# Altium PCB 24V Multiphase Buck.PcbDoc
Units mil, origin at the board's own origin, x right, y up, seen from the top; angles counter-clockwise.
Board outline 4765 x 3833 mil, 4 copper layers (TOP, GND, PWR, BOT), stack 60.512 mil thick; 70 components, 29 nets, 169 pads, 320 vias.
Unrouted connection lines stored in the file: 2.
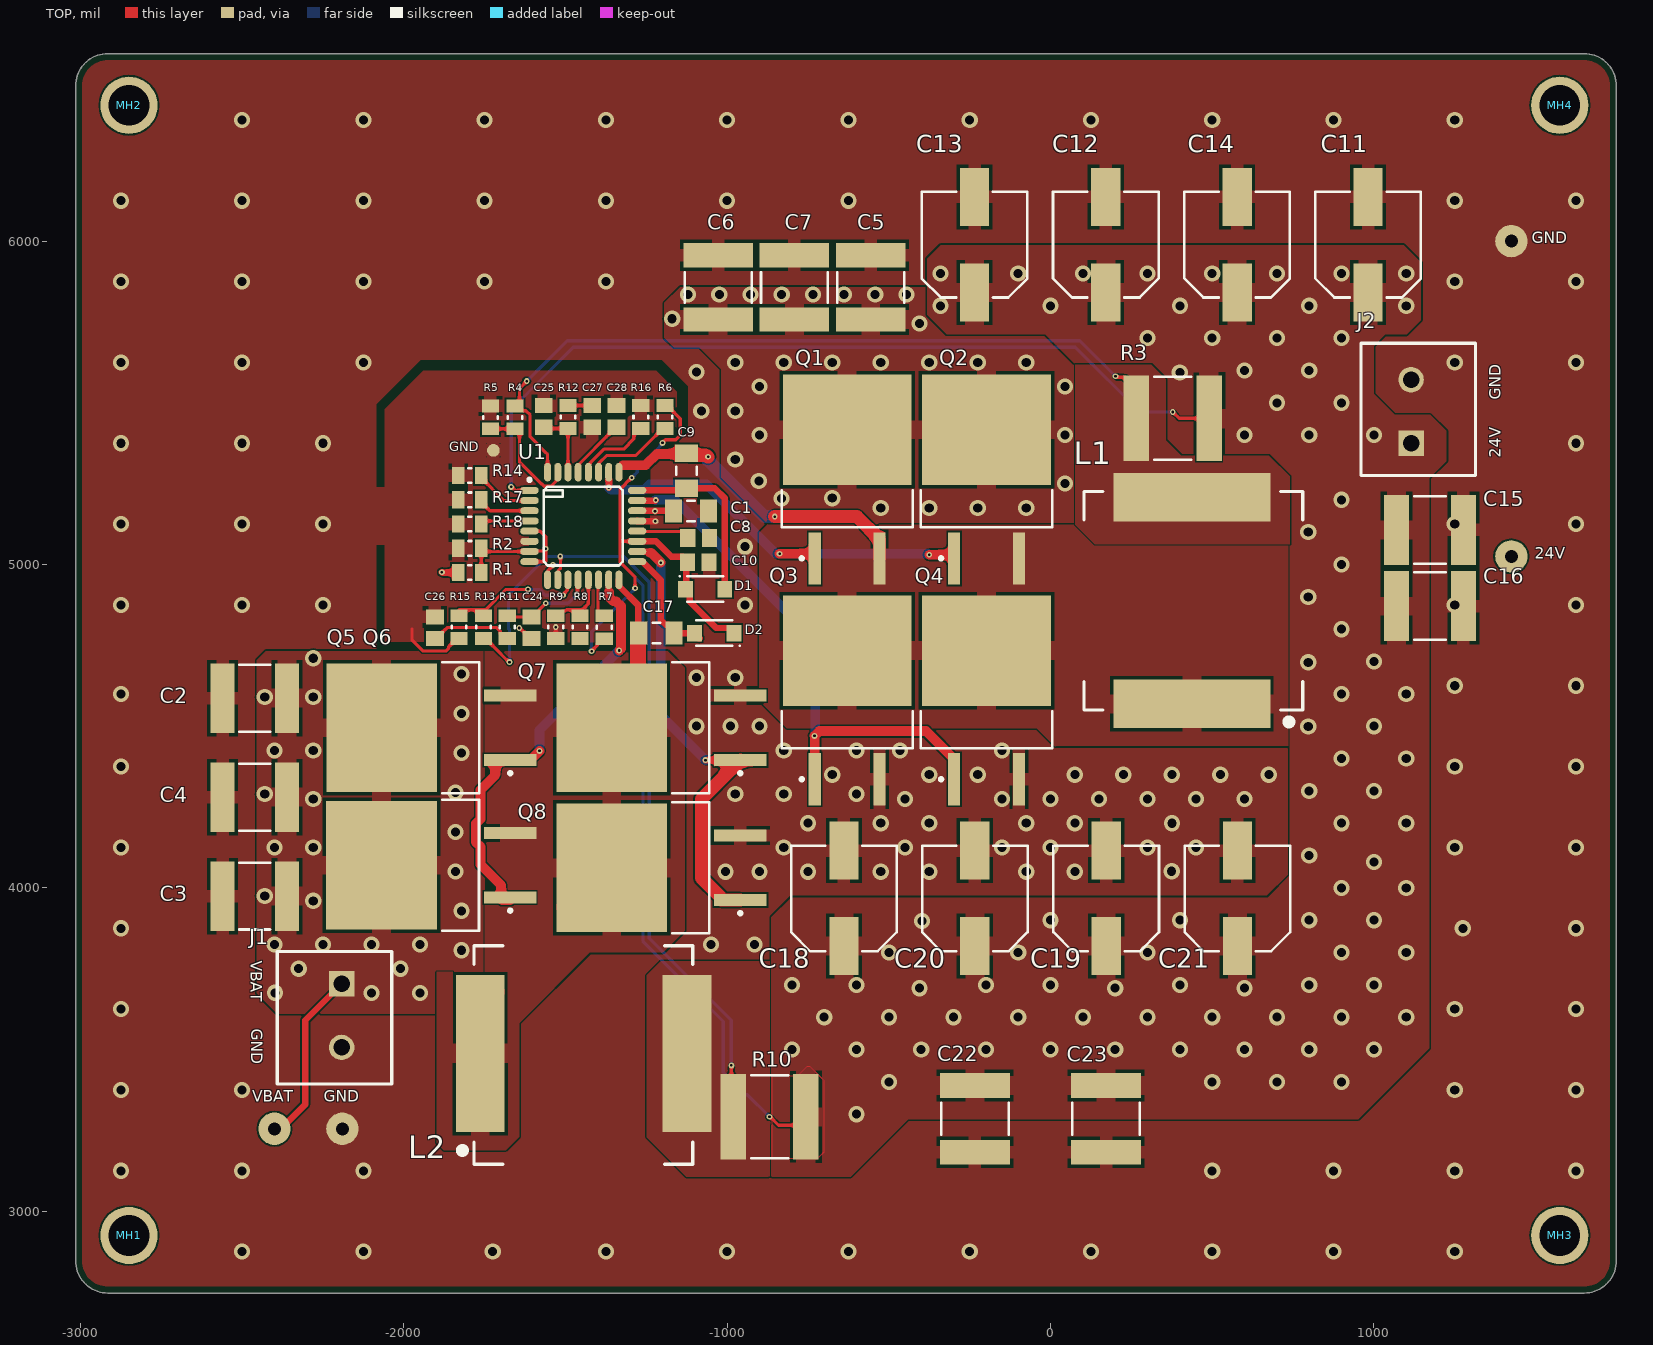
[diagram p0: TOP view]
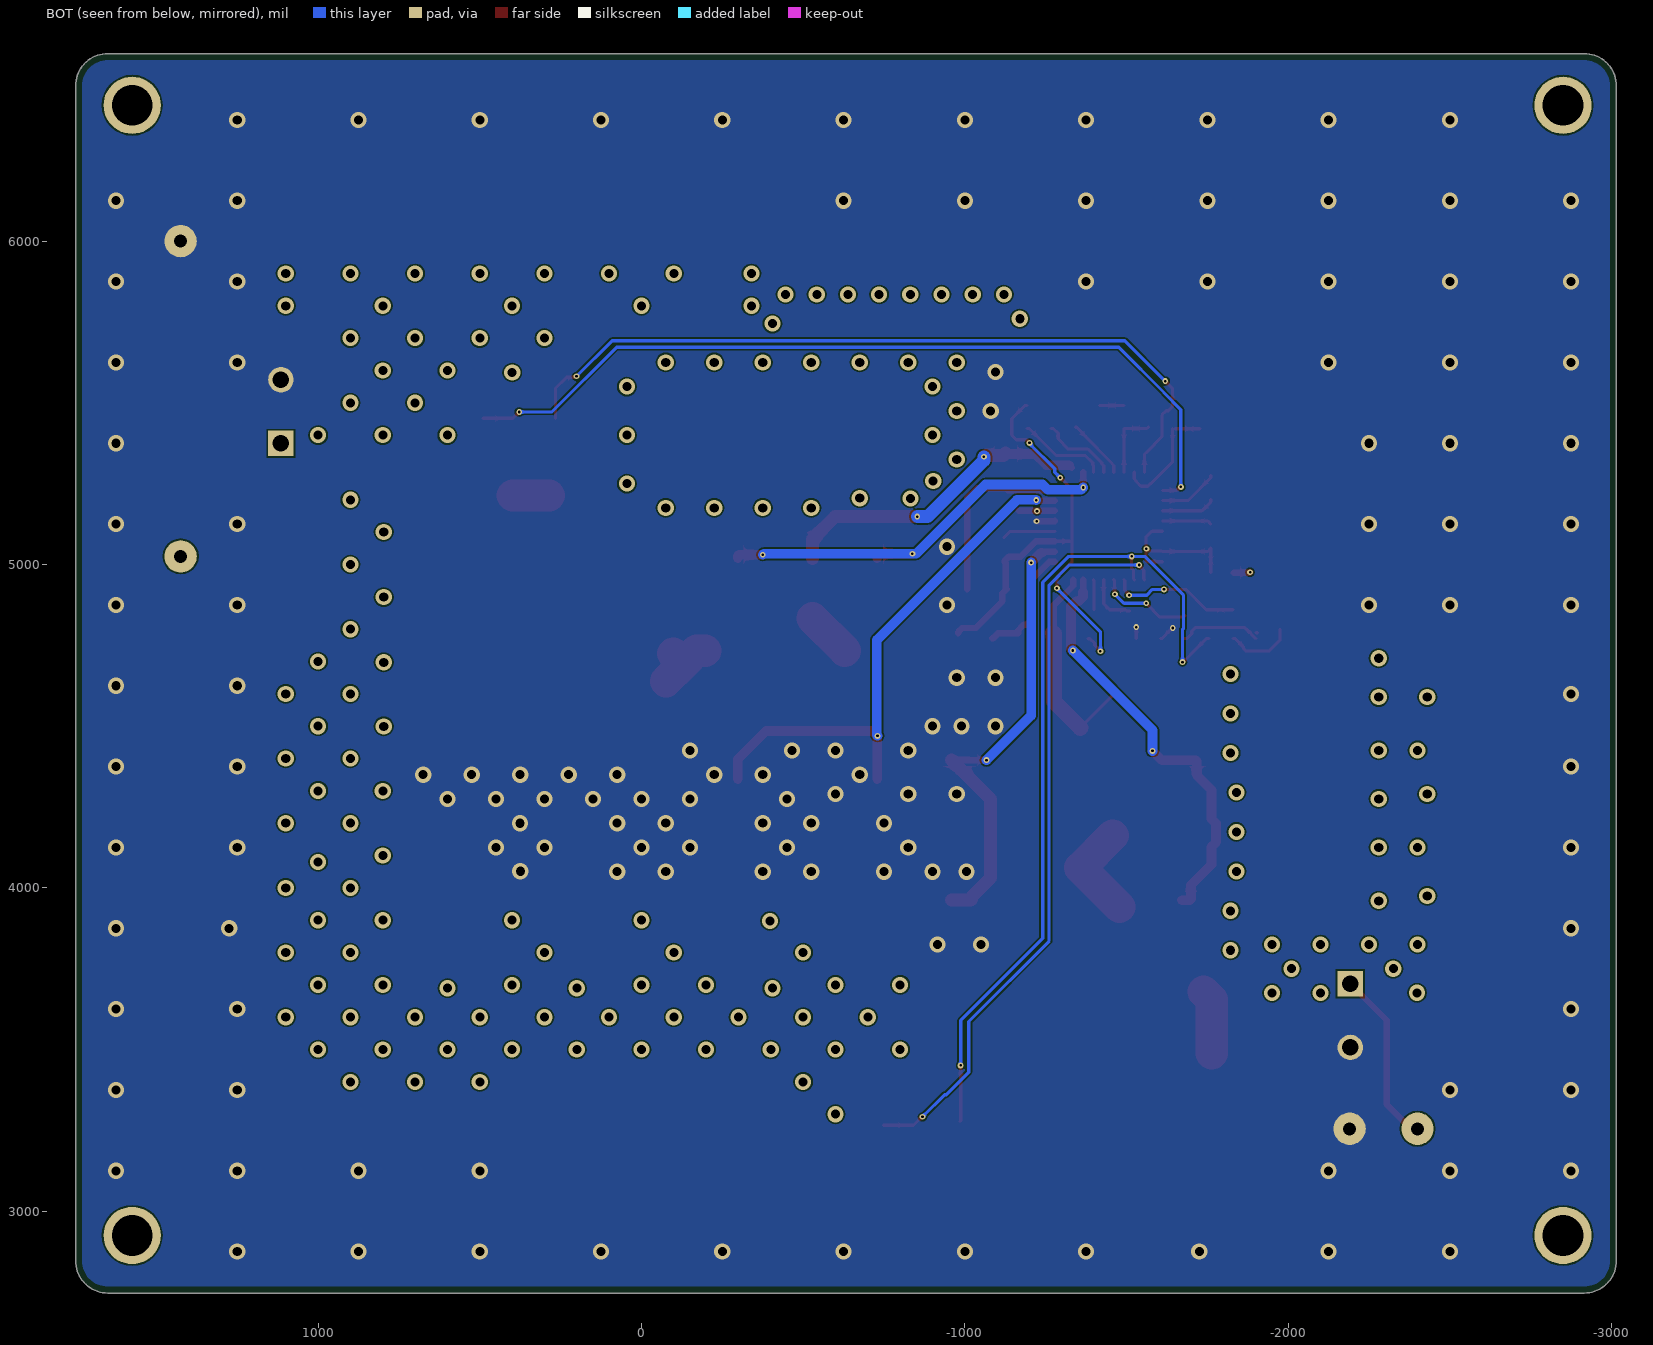
[diagram p1: BOT view, seen from below]
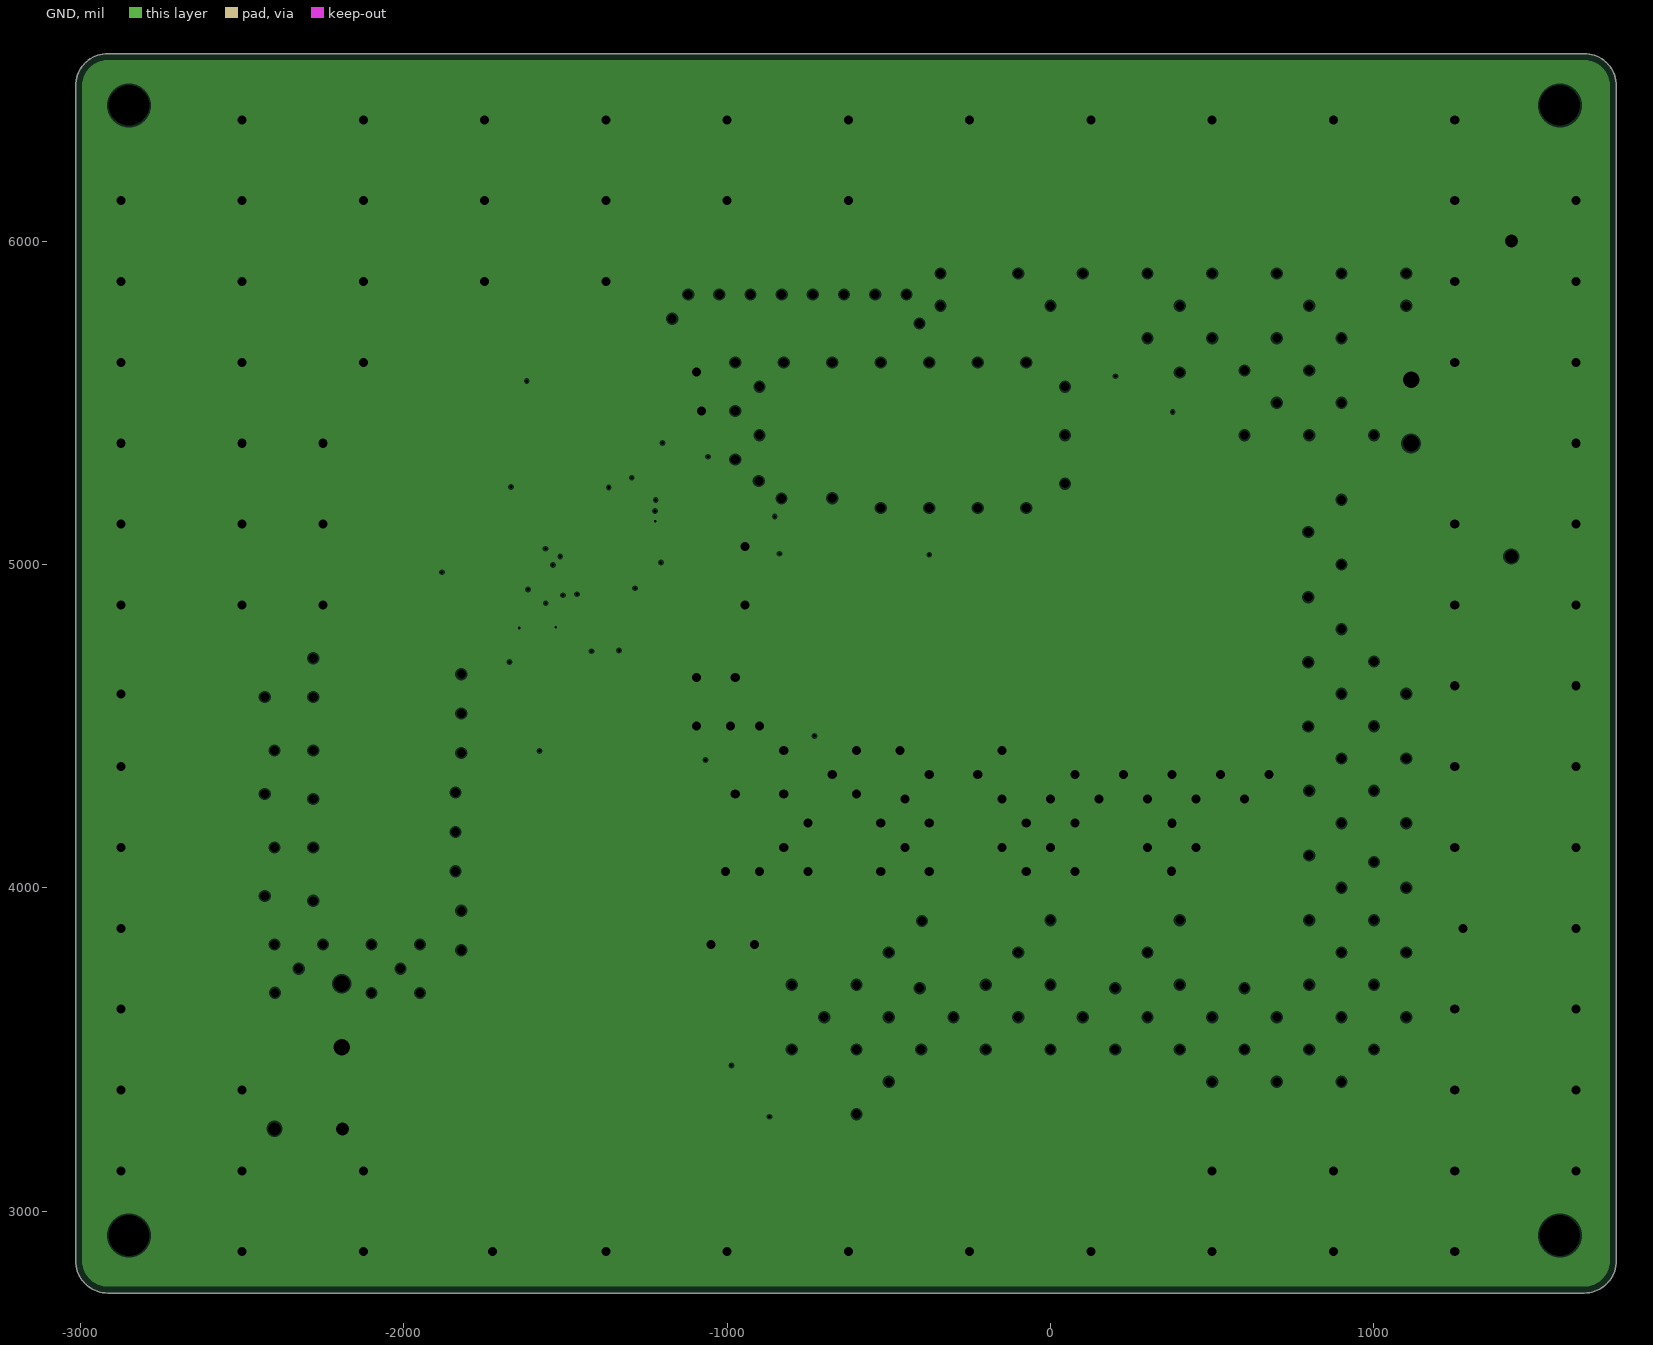
[diagram p2: GND, clearances drawn from the general rule]
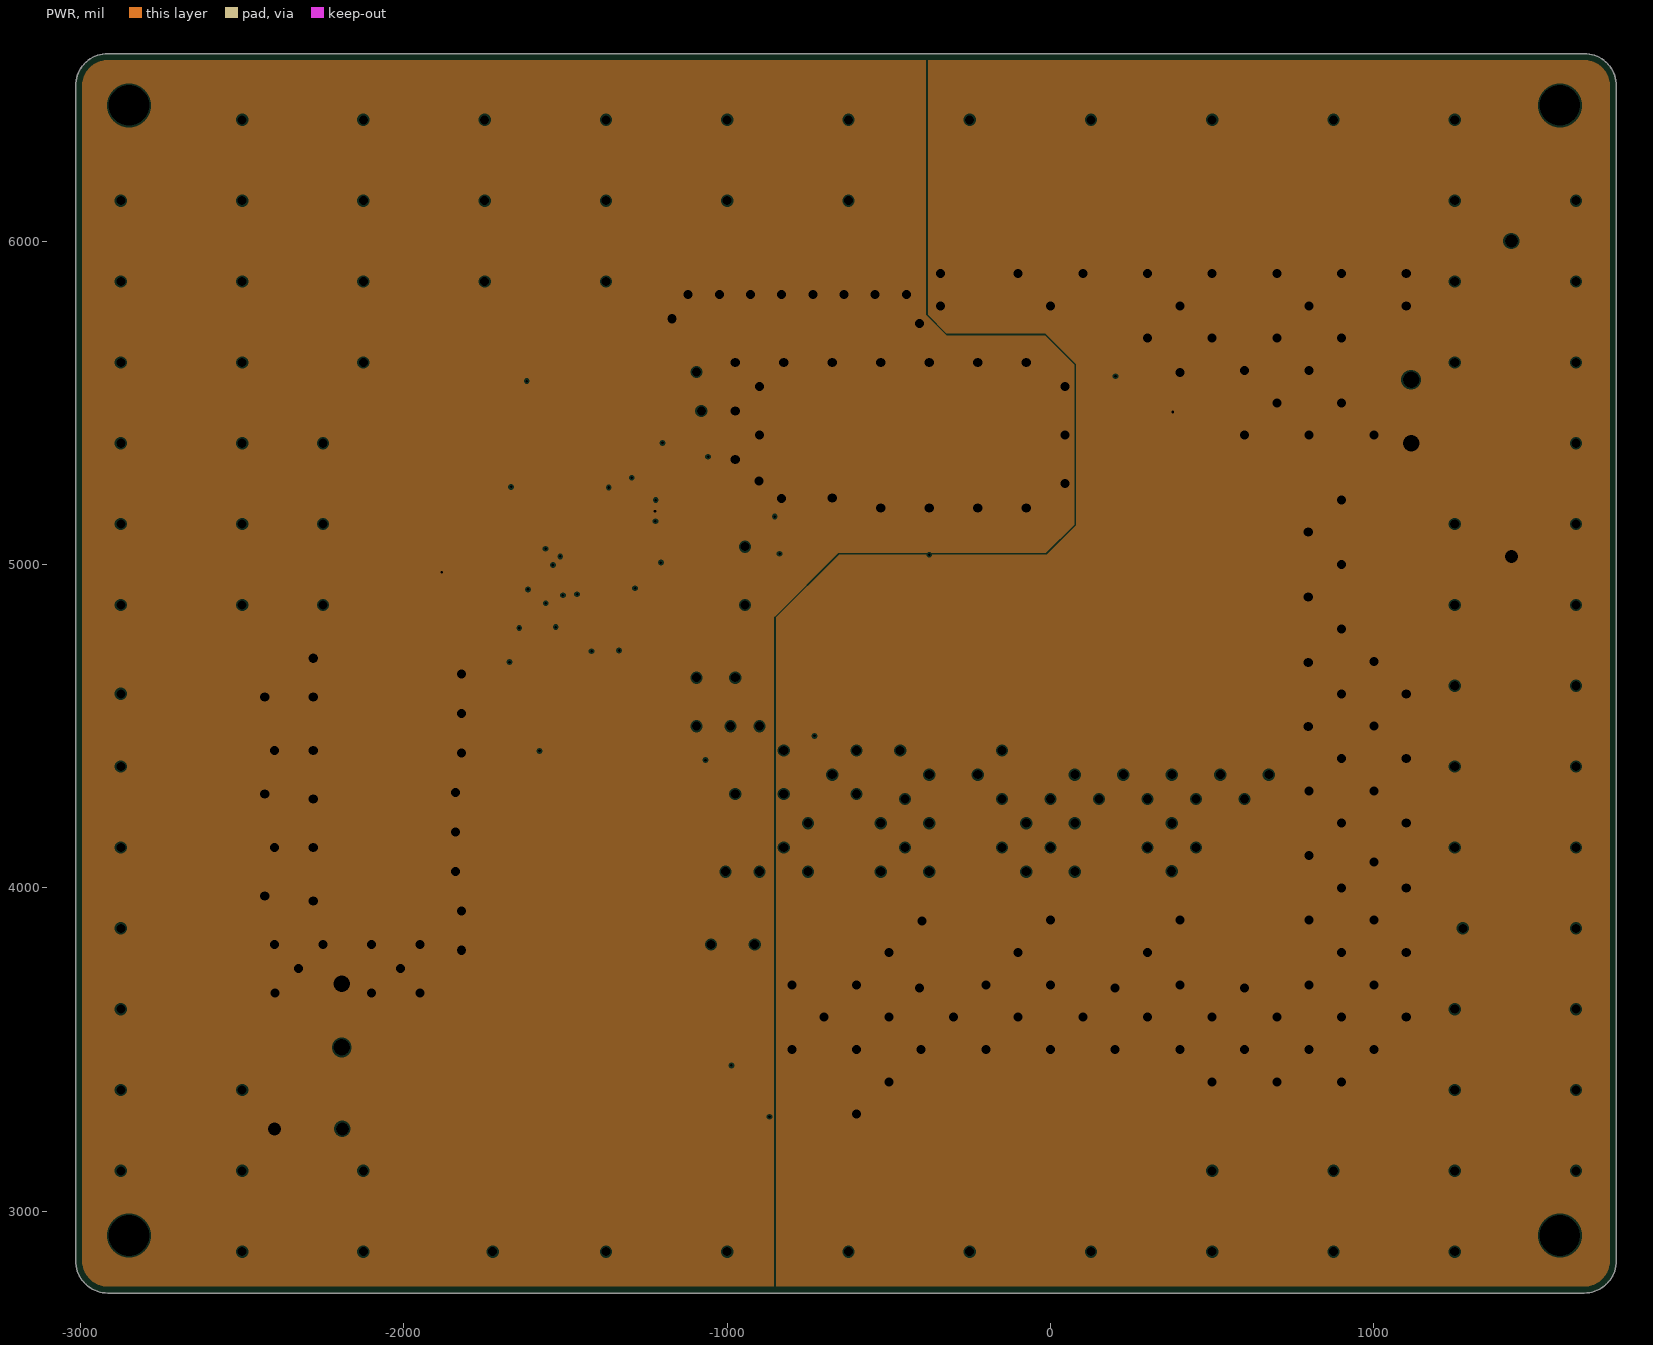
[diagram p3: PWR, clearances drawn from the general rule]
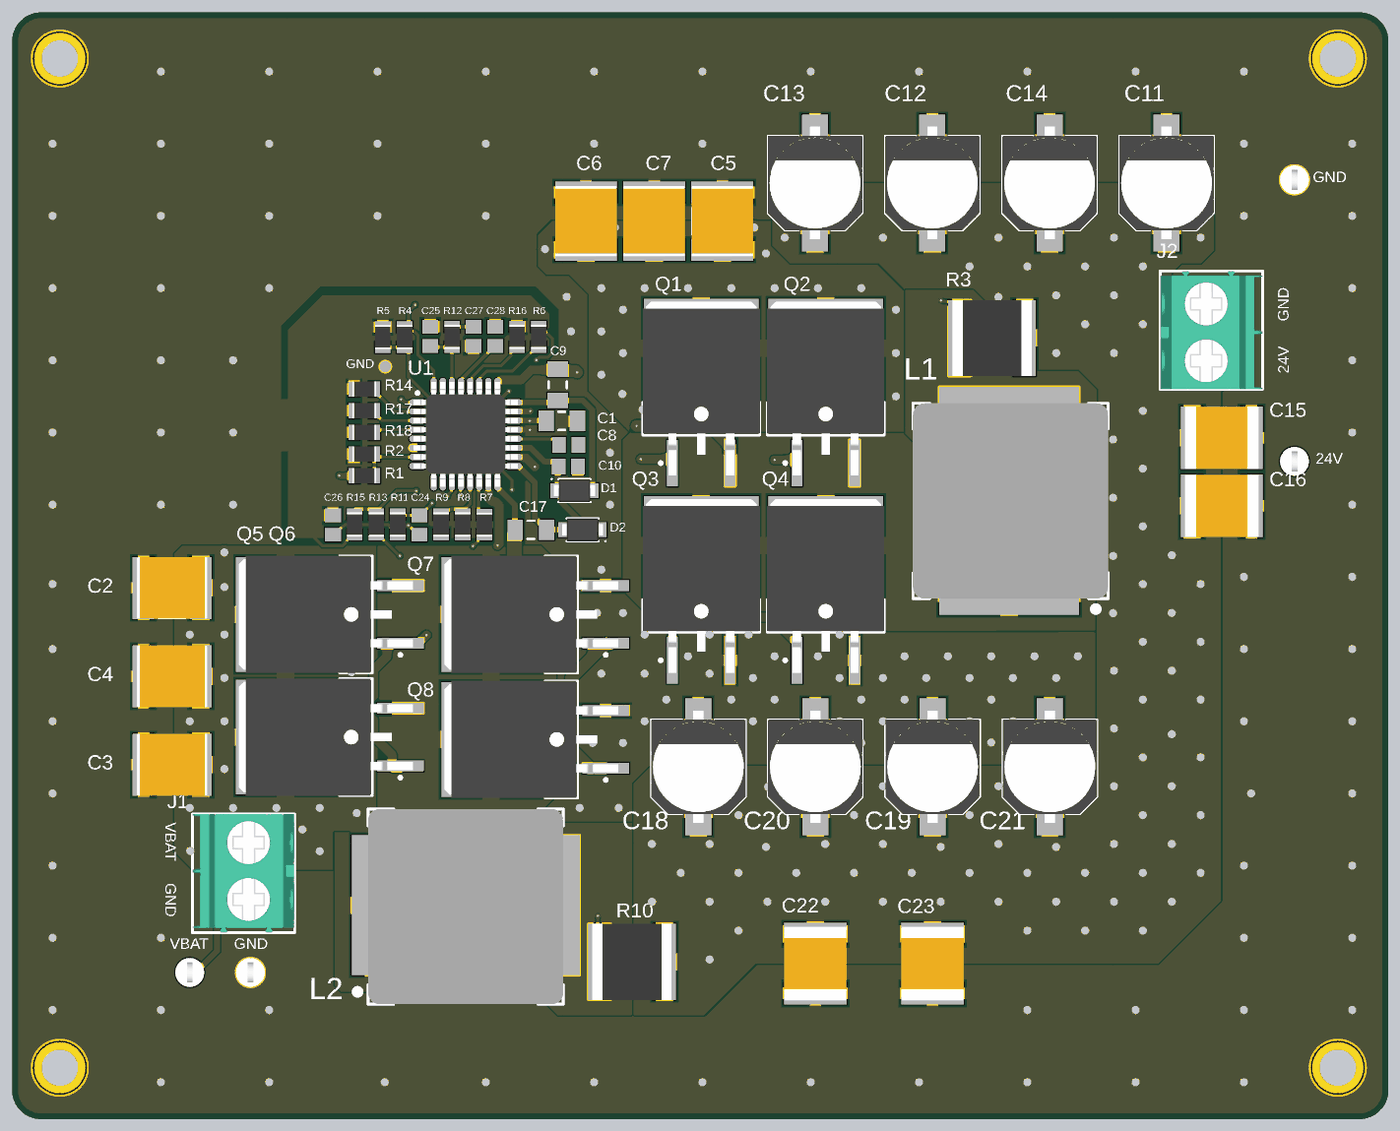
[diagram p4: 3D render of the assembled board from above, using the file's embedded part models]

## Layer stack, top to bottom
Top Solder: solder mask 1, SM-001, Dk 4
TOP: signal copper 1.378
Dielectric 2: prepreg 7.5, PP-017, Dk 4.3
GND: plane copper 1.378, net GND
Dielectric 3: core 40, Core-039, Dk 4.8
PWR: plane copper 1.378, net VBAT
Dielectric 4: prepreg 7.5, PP-017, Dk 4.3
BOT: signal copper 1.378
Bottom Solder: solder mask 1, SM-001, Dk 4

## Board outline
-3015,2847 -3015,6480 cw(c-2915,6480) -2915,6580 1650,6580 cw(c1650,6480) 1750,6480 1750,2847 cw(c1650,2847) 1650,2747 -2915,2747 cw(c-2915,2847)

## Design rules (kind name [scope] priority, off if disabled: settings)
BoardOutlineClearance [All] p1: gap=20 ignorepadtopadclearanceinfootprint=FALSE except(10: Text-OutlineEdge Text-CavityEdge Text-CutoutEdge Text-SplitBarrior Text-SplitContinuation)
Clearance [All] p1: gap=5 ignorepadtopadclearanceinfootprint=FALSE except(10: Arc-Arc Arc-Track Arc-SMDPad Arc-THPad Arc-Via Track-Track Track-SMDPad Track-THPad Track-Via)
HoleSize [All] p1: absolutevalues=TRUE maxlimit=200 minlimit=1 maxpercent=80.000 minpercent=20.000
MinimumSolderMaskSliver [All] p1: minsoldermaskwidth=5
PlaneClearance [All] p1: clearance=5
PlaneConnect [All] p1: pad.planeconnectstyle=Relief pad.reliefexpansion=20 pad.reliefentries=4 pad.reliefconductorwidth=10 pad.reliefairgap=10 via.planeconnectstyle=Direct via.reliefexpansion=20 via.reliefentries=4 via.reliefconductorwidth=10 via.reliefairgap=10
PlaneConnect PlaneConnect_1 [All] p2: pad.planeconnectstyle=Relief pad.reliefexpansion=20 pad.reliefentries=4 pad.reliefconductorwidth=10 pad.reliefairgap=10 via.planeconnectstyle=Direct via.reliefexpansion=20 via.reliefentries=4 via.reliefconductorwidth=10 via.reliefairgap=10
PolygonConnect PolygonConnect_1 [(InNet('24V') AND InComponent('U1')) vs InNet('24V')] p1: thpad.connectstyle=Relief thpad.reliefconductorwidth=10 thpad.reliefentries=4 thpad.polygonreliefangle="90 Angle" thpad.airgapwidth=10 smdpad.connectstyle=NoConnect smdpad.reliefconductorwidth=10 smdpad.reliefentries=4 smdpad.polygonreliefangle="90 Angle" smdpad.airgapwidth=10 via.connectstyle=Relief via.reliefconductorwidth=10 via.reliefentries=4 via.polygonreliefangle="90 Angle" via.airgapwidth=10
PolygonConnect "IC Direct Connect" [HasFootprint('CQFP80P900X900X120-32N') vs InNet('24V')] p2: thpad.connectstyle=Relief thpad.reliefconductorwidth=10 thpad.reliefentries=4 thpad.polygonreliefangle="90 Angle" thpad.airgapwidth=10 smdpad.connectstyle=Direct smdpad.reliefconductorwidth=10 smdpad.reliefentries=4 smdpad.polygonreliefangle="90 Angle" smdpad.airgapwidth=10 via.connectstyle=Relief via.reliefconductorwidth=10 via.reliefentries=4 via.polygonreliefangle="90 Angle" via.airgapwidth=10
PolygonConnect 24V [InNet('24V') vs InNet('24V')] p3: thpad.connectstyle=Direct thpad.reliefconductorwidth=10 thpad.reliefentries=4 thpad.polygonreliefangle="90 Angle" thpad.airgapwidth=10 smdpad.connectstyle=Relief smdpad.reliefconductorwidth=60 smdpad.reliefentries=4 smdpad.polygonreliefangle="90 Angle" smdpad.airgapwidth=10 via.connectstyle=Direct via.reliefconductorwidth=10 via.reliefentries=4 via.polygonreliefangle="90 Angle" via.airgapwidth=10
PolygonConnect NetL1_2 [InNet('NetL1_2') vs InNet('NetL1_2')] p4: thpad.connectstyle=Relief thpad.reliefconductorwidth=10 thpad.reliefentries=4 thpad.polygonreliefangle="90 Angle" thpad.airgapwidth=10 smdpad.connectstyle=Direct smdpad.reliefconductorwidth=60 smdpad.reliefentries=4 smdpad.polygonreliefangle="90 Angle" smdpad.airgapwidth=10 via.connectstyle=Direct via.reliefconductorwidth=10 via.reliefentries=4 via.polygonreliefangle="90 Angle" via.airgapwidth=10
PolygonConnect NetL2_1 [InNet('NetL2_2') vs InNet('NetL2_2')] p5: thpad.connectstyle=Relief thpad.reliefconductorwidth=10 thpad.reliefentries=4 thpad.polygonreliefangle="90 Angle" thpad.airgapwidth=10 smdpad.connectstyle=Direct smdpad.reliefconductorwidth=60 smdpad.reliefentries=4 smdpad.polygonreliefangle="90 Angle" smdpad.airgapwidth=10 via.connectstyle=Direct via.reliefconductorwidth=10 via.reliefentries=4 via.polygonreliefangle="90 Angle" via.airgapwidth=10
PolygonConnect LX2 [InNet('LX2') vs InNet('LX2')] p6: thpad.connectstyle=Relief thpad.reliefconductorwidth=10 thpad.reliefentries=4 thpad.polygonreliefangle="90 Angle" thpad.airgapwidth=10 smdpad.connectstyle=Relief smdpad.reliefconductorwidth=60 smdpad.reliefentries=4 smdpad.polygonreliefangle="90 Angle" smdpad.airgapwidth=10 via.connectstyle=Direct via.reliefconductorwidth=10 via.reliefentries=4 via.polygonreliefangle="90 Angle" via.airgapwidth=10
PolygonConnect LX1 [InNet('LX1') vs InNet('LX1')] p7: thpad.connectstyle=Relief thpad.reliefconductorwidth=10 thpad.reliefentries=4 thpad.polygonreliefangle="90 Angle" thpad.airgapwidth=10 smdpad.connectstyle=Relief smdpad.reliefconductorwidth=60 smdpad.reliefentries=4 smdpad.polygonreliefangle="90 Angle" smdpad.airgapwidth=10 via.connectstyle=Direct via.reliefconductorwidth=10 via.reliefentries=4 via.polygonreliefangle="90 Angle" via.airgapwidth=10
PolygonConnect VBAT [InNet('VBAT') vs InNet('VBAT')] p8: thpad.connectstyle=Direct thpad.reliefconductorwidth=10 thpad.reliefentries=4 thpad.polygonreliefangle="90 Angle" thpad.airgapwidth=10 smdpad.connectstyle=Relief smdpad.reliefconductorwidth=60 smdpad.reliefentries=4 smdpad.polygonreliefangle="90 Angle" smdpad.airgapwidth=10 via.connectstyle=Direct via.reliefconductorwidth=10 via.reliefentries=4 via.polygonreliefangle="90 Angle" via.airgapwidth=10
PolygonConnect GND [InNet('GND') vs InNet('GND')] p9: thpad.connectstyle=Direct thpad.reliefconductorwidth=10 thpad.reliefentries=4 thpad.polygonreliefangle="90 Angle" thpad.airgapwidth=10 smdpad.connectstyle=Relief smdpad.reliefconductorwidth=40 smdpad.reliefentries=4 smdpad.polygonreliefangle="90 Angle" smdpad.airgapwidth=10 via.connectstyle=Direct via.reliefconductorwidth=10 via.reliefentries=4 via.polygonreliefangle="90 Angle" via.airgapwidth=10
PolygonConnect [All] p10: thpad.connectstyle=Relief thpad.reliefconductorwidth=10 thpad.reliefentries=4 thpad.polygonreliefangle="90 Angle" thpad.airgapwidth=10 smdpad.connectstyle=Relief smdpad.reliefconductorwidth=10 smdpad.reliefentries=4 smdpad.polygonreliefangle="90 Angle" smdpad.airgapwidth=10 via.connectstyle=Direct via.reliefconductorwidth=10 via.reliefentries=4 via.polygonreliefangle="90 Angle" via.airgapwidth=10
RoutingVias [All] p1: holewidth=8 width=18 viastyle="Through Hole" minholewidth=8 minwidth=18 maxholewidth=8 maxwidth=18
SilkToSilkClearance [All] p1: silktosilkclearance=0
SilkToSolderMaskClearance [IsPad] p1: minsilkscreentomaskgap=5 clearancetoexposedcopper=TRUE
SolderMaskExpansion "Tented Vias" [IsVia] p1: expansion=4 istentingtop=TRUE useseparateexpansions=TRUE expansionbottom=4 istentingbottom=TRUE
SolderMaskExpansion [All] p2: expansion=4 istentingtop=FALSE useseparateexpansions=TRUE expansionbottom=4 istentingbottom=FALSE
Width [All] p1: maxlimit=100 minlimit=5 preferedwidth=10 minimp=50.000000 maximp=50.000000 favimp=50.000000
24 further rules are at their usual default settings.

## Components (designator, comment, footprint, x,y, rotation, side; value= is the part's Value field where it differs from the comment)
24V "TESTPOINT_LOOP" TESTPOINT_LOOP 1425,5025 r90 top (schematic designator TP2)
C1 "Ceramic Cap" C1206 -1112,5165 r180 top value=1uF
C2 "Ceramic Cap" C2220 -2461,4586.54 r0 top value=10uF
C3 "Ceramic Cap" C2220 -2461,3974.59 r0 top value=10uF
C4 "Ceramic Cap" C2220 -2461,4280.56 r0 top value=10uF
C5 "Ceramic Cap" C2220 -556,5857 r270 top value=10uF
C6 "Ceramic Cap" C2220 -1028,5857 r270 top value=10uF
C7 "Ceramic Cap" C2220 -792,5857 r270 top value=10uF
C8 "Ceramic Cap" C0805 -1088,5082 r180 top value=2.2uF
C9 "Ceramic Cap" C1206 -1126.23,5290.13 r270 top value=1uF
C10 "Ceramic Cap" C0805 -1089.46,5007 r180 top value=4.7uF
C11 "Electro Cap" CAPAE9983X105M 982,5989 r90 top value=33uF
C12 "Electro Cap" CAPAE9983X105M 171,5989 r90 top value=33uF
C13 "Electro Cap" CAPAE9983X105M -235,5989 r90 top value=33uF
C14 "Electro Cap" CAPAE9983X105M 577,5989 r90 top value=33uF
C15 "Ceramic Cap" CAPC6153X67N 1173.43,5107 r180 top value=NU
C16 "Ceramic Cap" CAPC6153X67N 1173.43,4871 r180 top value=NU
C17 "Ceramic Cap" C1206 -1219,4788 r0 top value=1uF
C18 "Electro Cap" CAPAE9983X105M -639,3967.36 r90 top value=33uF
C19 "Electro Cap" CAPAE9983X105M 172,3967.36 r90 top value=33uF
C20 "Electro Cap" CAPAE9983X105M -234,3967.36 r90 top value=33uF
C21 "Electro Cap" CAPAE9983X105M 578,3967.36 r90 top value=33uF
C22 "Ceramic Cap" CAPC6153X67N -234,3285.76 r90 top value=NU
C23 "Ceramic Cap" CAPC6153X67N 172,3285.76 r90 top value=NU
C24 "Ceramic Cap" C0805 -1605,4804.35 r90 top value=33pF
C25 "Ceramic Cap" C0805 -1567,5457.97 r270 top value=33pF
C26 "Ceramic Cap" C0805 -1904,4804.35 r270 top value=8.2nF
C27 "Ceramic Cap" C0805 -1417,5457.97 r90 top value=8.2nF
C28 "Ceramic Cap" C0805 -1342,5457.97 r270 top value=6.2nF
D1 "Schottky Diode" SODFL360X110-2N -1068,4924 r0 top
D2 "Schottky Diode" SODFL360X110-2N -1040,4788 r180 top
GND "EMR_TP" TP1 -1723,5372 r90 top (schematic designator TP5)
GND "TESTPOINT_LOOP" TESTPOINT_LOOP -2190,3255 r90 top (schematic designator TP4)
GND "TESTPOINT_LOOP" TESTPOINT_LOOP 1425,6000 r90 top (schematic designator TP3)
J1 "1935161" 1935161 -2192.14,3605 r270 top
J2 "1935161" 1935161 1115,5473 r90 top
L1 "Inductor" IHLP6767GZER5R6M11 437,4888.59 r90 top value=5.6uH
L2 "Inductor" IHLP6767GZER5R6M11 -1444,3488 r0 top value=5.6uH
MH1 "MOUNTING_HOLE_M3" MOUNTING_HOLE_3mm -2850,2925 r0 top
MH2 "MOUNTING_HOLE_M3" MOUNTING_HOLE_3mm -2850,6420 r0 top
MH3 "MOUNTING_HOLE_M3" MOUNTING_HOLE_3mm 1575,2925 r0 top
MH4 "MOUNTING_HOLE_M3" MOUNTING_HOLE_3mm 1575,6420 r0 top
Q1 "BUK768R1-100E,118" DPAK254P1530X450-3N -629,5263.09 r90 top
Q2 "BUK768R1-100E,118" DPAK254P1530X450-3N -198,5263.09 r90 top
Q3 "BUK768R1-100E,118" DPAK254P1530X450-3N -629,4580 r90 top
Q4 "BUK768R1-100E,118" DPAK254P1530X450-3N -198,4580 r90 top
Q5 "BUK768R1-100E,118" DPAK254P1530X450-3N -1915.09,4070 r180 top
Q6 "BUK768R1-100E,118" DPAK254P1530X450-3N -1915,4495 r180 top
Q7 "BUK768R1-100E,118" DPAK254P1530X450-3N -1203.46,4495 r180 top
Q8 "BUK768R1-100E,118" DPAK254P1530X450-3N -1203.46,4062 r180 top
R1 "Resistor" R0805 -1796,4975 r180 top value=191kΩ
R2 "Resistor" R0805 -1796,5050 r0 top value=10kΩ
R3 "Resistor" R2728 378,5452 r0 top value=5mΩ
R4 "Resistor" R0805 -1656,5455 r90 top value=187kΩ
R5 "Resistor" R0805 -1732,5455 r270 top value=6.49kΩ
R6 "Resistor" R0805 -1192,5456 r270 top value=10kΩ
R7 "Resistor" R0805 -1380,4806 r90 top value=10kΩ
R8 "Resistor" R0805 -1455,4806.31 r270 top value=30.9kΩ
R9 "Resistor" R0805 -1530,4806.31 r90 top value=1070Ω
R10 "Resistor" R2728 -869,3292 r0 top value=5mΩ
R11 "Resistor" R0805 -1680,4806.31 r90 top value=19.6kΩ
R12 "Resistor" R0805 -1492,5456 r270 top value=19.6kΩ
R13 "Resistor" R0805 -1754,4806.31 r270 top value=187kΩ
R14 "Resistor" R0805 -1796,5275 r0 top value=71.5kΩ
R15 "Resistor" R0805 -1829,4806.31 r90 top value=6.49kΩ
R16 "Resistor" R0805 -1267,5456 r270 top value=392kΩ
R17 "Resistor" R0805 -1796,5200 r0 top value=392kΩ
R18 "Resistor" R0805 -1796,5125 r0 top value=0Ω
U1 "MAX17559ACJ+" CQFP80P900X900X120-32N -1445,5119 r0 top
VBAT "TESTPOINT_LOOP" TESTPOINT_LOOP -2400,3255 r90 top (schematic designator TP1)

## Footprints (in the part's own frame and the unit in brackets; to place one, negate y for a bottom-side part, rotate by r counter-clockwise, add the part's x,y. Pads: shape width x height; smd on the part's side, far side on the other; paste and mask are expansions set on the pad)
1935161 [mm]
  rect 2x2 hole 1.3: 1(-2.5,0)
  round 2 hole 1.3: 2(2.5,0)
  silkscreen extent -5.03,-5.06 5.37,3.94, body extent -5.03,-5.06 5.37,3.94, height 11.45
C0805 [mm] "Chip Capacitor, 2-Leads, Body 2.00x1.25mm, IPC Medium Density"
  rect 1.2x1.4 smd: 1(-0.85,0) 2(0.85,0)
  body extent -1.05,-0.67 1.05,0.67, height 1.35
C1206 [mm] "Chip Capacitor, 2-Leads, Body 3.20x1.60mm, IPC Medium Density"
  rect 1.35x1.8 smd: 1(-1.375,0) 2(1.375,0)
  silkscreen extent -0.3,-0.8 0.3,0.8, body extent -1.7,-0.9 1.7,0.9, height 1.8
C2220 [mm] "Chip Capacitor, 2-Leads, Body 5.70x5.02mm, IPC Medium Density"
  rect 1.9x5.45 smd: 1(-2.525,0) 2(2.525,0)
  silkscreen extent -1.2,-2.62 1.2,2.63, body extent -3.1,-2.72 3.1,2.72, height 2.79
CAPAE9983X105M [mm] "Aluminum Electrolytic Capacitor, Body 8.30x8.30x10.50mm, IPC Low Density"
  rect 4.55x2.3 smd: 1(-3.75,0) 2(3.75,0)
  silkscreen extent -4.15,-4.15 4.15,4.15, body extent -4.95,-4.15 4.95,4.15, height 10.5
CAPC6153X67N [mm] "Chip Capacitor, 2-Leads, Body 6.10x5.30mm, IPC Medium Density"
  rect 1.95x5.5 smd: 1(-2.625,0) 2(2.625,0)
  silkscreen extent -1.25,-2.65 1.25,2.65, body extent -3.25,-2.75 3.25,2.75, height 6.7
CQFP80P900X900X120-32N [mm] "CQFP, 32-Leads, Body 9.00x9.00mm, Pitch 0.80mm, IPC Medium Density"
  oval 1.45x0.55 smd: 1(-4.225,2.8) 2(-4.225,2) 3(-4.225,1.2) 4(-4.225,0.4) 5(-4.225,-0.4) 6(-4.225,-1.2) 7(-4.225,-2) 8(-4.225,-2.8) 17(4.225,-2.8) 18(4.225,-2) 19(4.225,-1.2) 20(4.225,-0.4) 21(4.225,0.4) 22(4.225,1.2) 23(4.225,2) 24(4.225,2.8)
  oval 0.55x1.45 smd: 9(-2.8,-4.225) 10(-2,-4.225) 11(-1.2,-4.225) 12(-0.4,-4.225) 13(0.4,-4.225) 14(1.2,-4.225) 15(2,-4.225) 16(2.8,-4.225) 25(2.8,4.225) 26(2,4.225) 27(1.2,4.225) 28(0.4,4.225) 29(-0.4,4.225) 30(-1.2,4.225) 31(-2,4.225) 32(-2.8,4.225)
  silkscreen extent -4.35,-3.1 3.1,3.75, body extent -4.6,-4.6 4.6,4.6, height 1.15
DPAK254P1530X450-3N [mm] "D2-PAK, 3-Pads, Body 8.60x8.51mm (max), IPC Medium Density"
  rect 4.1x0.95 smd: 1(-6.2,2.54) 3(-6.2,-2.54)
  rect 8.7x10.1 smd: 2(3.9,0)
  silkscreen extent -6.32,-5.15 -0.85,5.15, body extent -7.3,-5.15 8,5.15, height 4.5
IHLP6767GZER5R6M11 [mm]
  rect 3.825x12.32 smd: 1(-8.117,0) 2(8.117,0)
  silkscreen extent -9.53,-8.71 8.57,8.46, body extent -8.6,-8.71 8.57,8.46, height 6.99
MOUNTING_HOLE_3mm [mm] "3mm Hole"
  round 4.5 hole 3.2 mask+0.3: 0(0,0)
R0805 [mm] "Chip Resistor, 2-Leads, Body 2.00x1.25mm, IPC Medium Density"
  rect 1x1.35 smd: 1(-0.9,0) 2(0.9,0)
  silkscreen extent -0.1,-0.58 0.1,0.58, body extent -1.05,-0.67 1.05,0.67, height 0.6
R2728 [mm] "Chip Resistor, 2-Leads, Body 6.71x6.45mm, IPC Medium Density"
  rect 2x6.7 smd: 1(-2.85,0) 2(2.85,0)
  silkscreen extent -1.45,-3.25 1.45,3.25, body extent -3.48,-3.35 3.48,3.35, height 1.24
SODFL360X110-2N [mm] "SODFL, 2-Leads, Body 1.80x3.60mm, IPC Medium Density"
  rect 1.15x1.3 smd: 1(-1.55,0) 2(1.55,0)
  silkscreen extent -2.05,-1 1.4,1.05, body extent -1.8,-1 1.8,1, height 1.1
TESTPOINT_LOOP [mm]
  round 2.54 hole 1.02: 1(0,0)
  body extent -1.27,-1.27 1.27,1.27, height 4.57
TP1 [mm]
  round 1 smd: 1(-0.483,0)

## Part data
24V GND GND VBAT: "TESTPOINT THRUHOLE", Manufacturer 1="Keystone Electronics", Manufacturer Part Number 1=5002, Package/Footprint=TH, Supplier Part Number 1=36-5002-ND, Mounting Type=TH, Supplier 1=Digi-Key
C1 C9 C17: library part CL31B105KCHNFNE, Capacitance=1uF, Manufacturer="Samsung Electro-Mechanics", Package=1206, Supplier Part Number=1276-3094-2-ND, Voltage=100V, Part Number=CL31B105KCHNFNE, Supplier=Digi-Key, Voltage Rating=100V
C2 C3 C4 C5 C6 C7: library part 22201C106KAT2A, Capacitance=10uF, Manufacturer="KYOCERA AVX", Package=2220, Supplier Part Number=478-12492-1-ND, Voltage=100V, Part Number=22201C106KAT2A, Supplier=Digi-Key, Voltage Rating=100V
C8: library part CL21A225KBFNNNE, Capacitance=2.2uF, Manufacturer="Samsung Electro-Mechanics", Package=0805, Supplier Part Number=1276-6702-1-ND, Voltage=50V, Part Number=CL21A225KBFNNNE, Supplier=Digi-Key, Voltage Rating=50V
C10: library part GRM21BR61H475KE51L, Capacitance=4.7uF, Manufacturer="Murata Electronics", Package=0805, Supplier Part Number=490-10751-1-ND, Voltage=50V, Part Number=GRM21BR61H475KE51L, Supplier=Digi-Key, Voltage Rating=50V
C11 C12 C13 C14 C18 C19 C20 C21: library part EEV-FC1H330P, Capacitance=33uF, Manufacturer="Panasonic Electronic Components", Package=Radial, Supplier Part Number=PCE3258CT-ND, Voltage=50V, Part Number=EEV-FC1H330P, Supplier=Digi-Key, Voltage Rating=50V
C15 C16 C22 C23: library part KRM55WR71H336MH01K, Capacitance=NU, Manufacturer="Murata Electronics", Package="Stacked SMD", Supplier Part Number=490-17695-1-ND, Voltage=NV, Part Number=KRM55WR71H336MH01K, Supplier=Digi-Key, Voltage Rating=NV
C24 C25: library part C0805C330K5GAC7800, Capacitance=33pF, Manufacturer=KEMET, Package=0805, Supplier Part Number=339-C0805C330K5GAC7800CT-ND, Voltage=50V, Part Number=C0805C330K5GAC7800, Supplier=Digi-Key, Voltage Rating=50V
C26 C27: library part CC0805KRX7R9BB822, Capacitance=8.2nF, Manufacturer=YAGEO, Package=0805, Supplier Part Number=311-4331-1-ND, Voltage=50V, Part Number=CC0805KRX7R9BB822, Supplier=Digi-Key, Voltage Rating=50V
C28: library part GRM2195C1H622JA01D, Capacitance=6.2nF, Manufacturer="Murata Electronics", Package=0805, Supplier Part Number=490-1637-1-ND, Voltage=50V, Part Number=GRM2195C1H622JA01D, Supplier=Digi-Key, Voltage Rating=50V
D1 D2: library part DSS110UTR, Package=SOD-123F, Supplier Part Number=1655-1931-1-ND, Manufacturer Part Number=DSS110UTR, Part Number=DSS110UTR, Supplier=Digi-Key, Vr=100V, Vr (Max)=100V
J1: "2 Port Terminal", Manufacturer="Phoenix Contact", Supplier Part Number=277-1667-ND, Mounting Type=TH, Part Number=1935161, Supplier=Digi-Key
J2: Manufacturer="Phoenix Contact", Supplier Part Number=277-1667-ND, Mounting Type=TH, Part Number=1935161, Supplier=Digi-Key
L1 L2: library part IHLP6767GZER5R6M11, Inductance=5.6uH, Manufacturer="Vishay Dale", Saturation Current=21A, Supplier Part Number=541-1283-1-ND, Tolerance=20%, DCR=4.44mΩ, Part Number=IHLP6767GZER5R6M11, Supplier=Digi-Key
Q1 Q2 Q3 Q4 Q5 Q6 Q7 Q8: Manufacturer="Nexperia USA Inc.", Package=D2PAK, Supplier Part Number=1727-1062-1-ND, Id=100A, Manufacturer Part Number=BUK768R1-100E,118, Part Number=BUK768R1-100E,118, Supplier=Digi-Key, Type=N-CH, Vds=100V, Vgs (Max)=20V
R1: library part RC0805FR-07191KL, Manufacturer=Yageo, Package=0805, Resistance=191kΩ, Supplier Part Number=311-191KCRTR-ND, Package/Footprint=0805, Part Number=RC0805FR-07191KL, Supplier=Digi-Key
R2 R6 R7: library part RC0805JR-0710KL, Manufacturer=Yageo, Package=0805, Resistance=10kΩ, Supplier Part Number=311-10KARTR-ND, Package/Footprint=0805, Part Number=RC0805JR-0710KL, Supplier=Digi-Key
R3 R10: library part CSSH2728FT5L00, Manufacturer=Yageo, Package=2728, Resistance=5mΩ, Supplier Part Number=CSSH2728FT5L00TR-ND, Package/Footprint=2728, Part Number=CSSH2728FT5L00, Supplier=Digi-Key
R4 R13: library part RT0805BRD07187KL, Manufacturer=Yageo, Package=0805, Resistance=187kΩ, Supplier Part Number=13-RT0805BRD07187KLCT-ND, Package/Footprint=0805, Part Number=RT0805BRD07187KL, Supplier=Digi-Key
R5 R15: library part RC0805FR-076K49L, Manufacturer=Yageo, Package=0805, Resistance=6.49kΩ, Supplier Part Number=311-6.49KCRTR-ND, Package/Footprint=0805, Part Number=RC0805FR-076K49L, Supplier=Digi-Key
R8: library part RMCF0805FT30K9, Manufacturer="Stackpole Electronics Inc", Package=0805, Resistance=30.9kΩ, Supplier Part Number=RMCF0805FT30K9CT-ND, Package/Footprint=0805, Part Number=RMCF0805FT30K9, Supplier=Digi-Key
R9: library part RC0805FR-071K07L, Manufacturer=Yageo, Package=0805, Resistance=1070Ω, Supplier Part Number=311-1.07KCRCT-ND, Package/Footprint=0805, Part Number=RC0805FR-071K07L, Supplier=Digi-Key
R11 R12: library part AC0805FR-0719K6L, Manufacturer=Yageo, Package=0805, Resistance=19.6kΩ, Supplier Part Number=YAG5355TR-ND, Package/Footprint=0805, Part Number=AC0805FR-0719K6L, Supplier=Digi-Key
R14: library part RC0805FR-0771K5L, Manufacturer=Yageo, Package=0805, Resistance=71.5kΩ, Supplier Part Number=311-71.5KCRCT-ND, Package/Footprint=0805, Part Number=RC0805FR-0771K5L, Supplier=Digi-Key
R16 R17: library part RC0805FR-07392KL, Manufacturer=Yageo, Package=0805, Resistance=392kΩ, Supplier Part Number=311-392KCRCT-ND, Package/Footprint=0805, Part Number=RC0805FR-07392KL, Supplier=Digi-Key
R18: library part RC0805JR-070RL, Manufacturer=Yageo, Package=0805, Resistance=0Ω, Supplier Part Number=311-0.0ARCT-ND, Package/Footprint=0805, Part Number=RC0805JR-070RL, Supplier=Digi-Key
U1: "IC REG CTRLR BUCK 32TQFP", Case/Package=TQFP, Manufacturer=Maxim, Max Operating Temperature=125°C, Min Operating Temperature=-40°C, Supplier Part Number 1=MAX17559ACJ+-ND, Category="Voltage Regulators - Switching", Manufacturer Part Number=MAX17559ACJ+, Number of Outputs=2, Number of Pins=32, Packaging=Tray, Part Number=MAX17559ACJ+, Pricing 1="1=7.47000, 10=6.75100, 25=6.43680, 80=5.58925, 250=5.33800, 500=4.86700, 1000=4.71000 (USD)", RoHS=Yes, Stock 1=210, Supplier 1=Digi-Key
GND: Part Number=EMR_TP

## Via types
v1: diameter 50, hole 28, TOP to BOT, tented both sides, 286 vias
v2: diameter 18, hole 8, TOP to BOT, tented both sides, 34 vias

## Nets (pads, with @x,y where several pads share a name; then routed paths per layer and width w, separated by ;. In a path a pad name is that pad's centre, name@x,y a point inside that pad or via, vN(x,y) a via of type N, cw(c..) or ccw(c..) an arc to the next point about the centre after c; other vN are vias at no path point)
24V: 24V.1 C8.2 C11.1 C12.1 C13.1 C14.1 C15.2 C16.2 C18.1 C19.1 C20.1 C21.1 C22.2 C23.2 J2.1 R3.2 R8.2 R10.2 U1.1 U1.9 U1.20 | length 5093.9
  TOP w10: v2(-1668,5240) -1665.84,5240 -1655.07,5229.24 U1.1 ; U1.9 -1553.01,4954.89 -1553.01,4982.3 -1539,4996.3 v2(-1539,4998.47) ; U1.20 -1277.75,5102.34 -1140.09,5102.34 -1121.46,5083.71 C8.2 ; v2(-869,3292) -867.31,3292 -841.31,3266 R10.2@-748.8,3266 ; v2(378,5471.69) 397.69,5452 R3.2
  BOT w10: v2(-1668,5240) -1668,5479 -1616,5531 -1616,5531.94 -1475.94,5672 77.06,5672 277.37,5471.69 v2(378,5471.69) ; v2(-1539,4998.47) -1322.89,4998.47 -1260.68,4936.26 -1260.68,3835.4 -1012,3586.72 -1012,3430.06 -942.24,3360.29 -937.29,3360.29 v2(-869,3292)
  other v1: -600,3300 -500,3400 500,3400 700,3400 900,3400 -800,3500 -600,3500 -400,3500 -200,3500 0,3500 200,3500 400,3500 600,3500 800,3500 1000,3500 -700,3600 -500,3600 -300,3600 -100,3600 100,3600 300,3600 500,3600 700,3600 900,3600 1100,3600 -404.79,3689.8 199.96,3689.8 599.68,3689.8 -800,3700 -600,3700 -200,3700 0,3700 400,3700 800,3700 1000,3700 -500,3800 -100,3800 300,3800 900,3800 1100,3800 -397.39,3897.67 0,3900 400,3900 800,3900 1000,3900 900,4000 1100,4000 1000,4080 800,4100 900,4200 1100,4200 800,4300 1000,4300 900,4400 1100,4400 797,4499.32 1000,4500 900,4600 1100,4600 797,4697.46 1000,4700 900,4800 797,4899.04 900,5000 797,5100.63 900,5200 600,5400 800,5400 1000,5400 700,5500 900,5500 399.85,5593.73 600,5600 800,5600 300,5700 500,5700 700,5700 900,5700 -340,5800 0,5800 400,5800 800,5800 1100,5800 -340,5900 -100,5900 100,5900 300,5900 500,5900 700,5900 900,5900 1100,5900
BST1: C9.2 D1.2 U1.24 | length 568
  TOP w20: U1.24 -1132.99,5229.24 C9.2 -1038.57,5236 -1006.98,5204.4 D1.2
BST2: C17.2 D2.2 U1.17 | length 369
  TOP w20: U1.17 -1261.39,5008.76 -1260.12,5007.49 -1260.12,5007.18 -1205,4952.07 -1205,4828.13 -1190.3,4813.43 -1181.44,4813.43 -1164.87,4796.86 C17.2 -1103.98,4788 -1088.39,4772.41 D2.2@-1085.48,4772.41
COMP1: C25.2 R12.2 U1.30 | length 212
  TOP w10: C25.2 -1563.06,5420.57 R12.2 -1492.24,5420.32 U1.30
COMP2: C24.2 R11.2 U1.12 | length 297.9
  TOP w10: R11.2 -1676.06,4837.81 C24.2@-1601.06,4837.81 ; C24.2 C24.2@-1601.06,4837.81 ; v2(-1561,4880) -1561,4879.65 -1582.44,4858.21 -1582.44,4856.43 C24.2@-1601.06,4837.81 ; v2(-1464,4908) -1462.98,4909.02 -1462.98,4950.43 U1.12
  BOT w10: v2(-1561,4880) -1492,4880 v2(-1464,4908)
DH1: Q1.1 Q2.1 U1.26 | length 1344.7
  TOP w20: v2(-1366,5238) U1.26@-1366,5285.08
  TOP w30: v2(-838,5033) -732.7,5033 -729,5029.3 Q1.1 ; v2(-375,5030) -301.7,5030 -298,5026.3 Q2.1
  BOT w30: v2(-1366,5238) -1359.05,5231.05 -1257.06,5231.05 -1240.42,5247.69 -1063.69,5247.69 -849,5033 v2(-838,5033) -378,5033 v2(-375,5030)
DH2: Q5.1 Q6.1 U1.15 | length 1316.7
  TOP w20: U1.15 -1365.94,4952.35 -1365.94,4933.46 -1365.59,4933.11 -1365.59,4915.1
  TOP w30: Q5.1@-1670.91,3962 -1695.43,3962 -1699.13,3965.7 -1699.13,4008.13 -1763,4072 -1763,4127.24 -1776.71,4140.94 -1776.71,4199.06 -1763,4212.76 -1763,4302.91 -1717.03,4348.87 -1717.03,4391.3 -1713.33,4395 Q6.1 -1608.9,4395 v2(-1580.35,4423.54) ; -1365.59,4915.1 -1365.59,4899.59 -1352.11,4886.12 -1343.07,4886.12 -1328.43,4871.47 -1328.43,4739.57 v2(-1334,4734)
  BOT w30: v2(-1580.35,4423.54) -1580.35,4487.65 v2(-1334,4734)
DL1: Q3.1 Q4.1 U1.23 | length 1699.7
  TOP w20: U1.23 -1222.51,5197.74 v2(-1221.01,5199.24) ; v2(-730,4470) v2@-729,4469
  TOP w30: v2(-730,4470) -715,4485 -385.09,4485 -298,4397.91 Q4.1 ; Q3.1 v2@-729,4469
  BOT w30: v2(-1221.01,5199.24) -1220.06,5200.18 -1161.18,5200.18 -728,4767 -728,4472 v2(-730,4470)
DL2: Q7.1 Q8.1 U1.18 | length 1430.9
  TOP w20: U1.18@-1278.35,5039.94 -1241.77,5039.94 -1238.58,5036.76 ; v2(-1067,4395) Q7.1
  TOP w30: -1238.58,5036.76 -1235.76,5036.76 v2(-1205,5006)
  TOP w40: Q8.1 -1018.77,3962 -1020.07,3963.3 -1020.07,3970.96 -1080,4030.89 -1080,4274.36 Q7.1
  BOT w30: v2(-1205,5006) -1205,4533 v2(-1067,4395)
EN: R1.1 R2.2 U1.5 U1.7 U1.8 | length 465.2
  TOP w10: R1.1 R2.2 -1750.83,5040.26 U1.7 -1609.86,5041.74 -1561.76,5041.74 -1560.1,5043.4 -1560.1,5047 v2(-1561.63,5048.53) ; U1.8 -1562.93,5008.76 -1560,5011.69 v2@-1560,5043 ; U1.5 -1610.56,5102.48 -1578.48,5102.48 -1560,5084 v2@-1560,5048.53
FB1: R4.1 R5.2 U1.31 | length 360.9
  TOP w10: R5.2@-1727,5419.57 R4.1@-1651,5419.57 ; R4.1@-1642,5420.57 -1642,5316 -1575.24,5249.24 -1573.37,5249.24 -1565.93,5241.8 -1544.54,5241.8 -1529.41,5256.92 -1529.41,5258.8 -1523.74,5264.47 U1.31
FB2: R13.1 R15.2 U1.11 | length 408.8
  TOP w10: R15.2@-1829,4859.75 -1747.11,4859.75 -1683.86,4923 v2(-1616,4923) ; v2(-1508,4905) -1508,4907.16 -1494.47,4920.69 -1494.47,4950.43 U1.11
  BOT w10: v2(-1616,4923) -1580.2,4923 -1562.2,4905 v2(-1508,4905)
GND: C1.1 C2.1 C3.1 C4.1 C5.1 C6.1 C7.1 C8.1 C10.1 C11.2 C12.2 C13.2 C14.2 C15.1 C16.1 C18.2 C19.2 C20.2 C21.2 C22.1 C23.1 C24.1 C25.1 C26.1 C27.1 C28.1 GND.1 J1.2 J2.2 Q3.3 Q4.3 Q7.3 Q8.3 R2.1 R5.1 R9.1 R14.1 R15.1 R16.1 R17.1 R18.1 U1.6 U1.21 | length 356
  TOP w10: -1975,4800 -1975,4767 -1940.26,4732.26 -1870.23,4732.26 -1861.44,4741.05 -1861.44,4745.33 -1835.89,4770.88 R15.1 ; v2(-1643.17,4803.58) -1638.77,4799.19 -1637.24,4799.19 -1608.94,4770.88 C24.1 ; R9.1 v2(-1530,4806.31)
  TOP w20: U1.21 -1278.35,5134.43 -1244.28,5134.43 -1243.85,5134 v2(-1222,5134)
  other v1: -2500,2875 -2125,2875 -1725,2875 -1375,2875 -1000,2875 -625,2875 -250,2875 125,2875 500,2875 875,2875 1250,2875 -2875,3125 -2500,3125 -2125,3125 500,3125 875,3125 1250,3125 1625,3125 -2875,3375 -2500,3375 1250,3375 1625,3375 -2875,3625 1250,3625 1625,3625 -1050,3825 -915,3825 -2875,3875 1275,3875 1625,3875 -1005,4050 -900,4050 -750,4050 -525,4050 -375,4050 -75,4050 75,4050 374.76,4051.34 -2875,4125 -825,4125 -450,4125 -150,4125 0,4125 300,4125 450,4125 1250,4125 1625,4125 -750,4200 -525,4200 -375,4200 -75,4200 75,4200 375.24,4199.74 -450,4275 -150,4275 0,4275 150,4275 300,4275 450,4275 600,4275 -975,4290 -825,4290 -600,4290 -675,4350 -375,4350 -225,4350 75,4350 225,4350 375,4350 525,4350 675,4350 -2875,4375 1250,4375 1625,4375 -825,4425 -600,4425 -465,4425 -150,4425 -1095,4500 -990,4500 -900,4500 -2875,4600 1250,4625 1625,4625 -1095,4650 -975,4650 -2875,4875 -2500,4875 -2250,4875 -945,4875 1250,4875 1625,4875 -945,5055 -2875,5125 -2500,5125 -2250,5125 1250,5125 1625,5125 -2875,5375 -2500,5375 -2250,5375 1625,5375 -1080,5475 -1095,5595 -2875,5625 -2500,5625 -2125,5625 1250,5625 1625,5625 -2875,5875 -2500,5875 -2125,5875 -1750,5875 -1375,5875 1250,5875 1625,5875 -2875,6125 -2500,6125 -2125,6125 -1750,6125 -1375,6125 -1000,6125 -625,6125 1250,6125 1625,6125 -2500,6375 -2125,6375 -1750,6375 -1375,6375 -1000,6375 -625,6375 -250,6375 125,6375 500,6375 875,6375 1250,6375
ILIM1: R16.2 U1.28 | length 242.4
  TOP w10: U1.28 -1429.25,5306.21 -1423.58,5311.88 -1423.58,5314.7 -1381.28,5357 -1320,5357 -1288.57,5388.43 -1288.57,5405.88 -1273.89,5420.57 R16.2
ILIM2: R17.2 U1.3 | length 167.2
  TOP w10: R17.2 -1760.57,5193.11 -1733.7,5166.24 U1.3
ILIMSEL: R18.2 U1.4 | length 153.3
  TOP w10: R18.2 -1750.82,5134.75 U1.4
LX1: C9.1 L1.1 Q1.3 Q2.3 Q3.2 Q4.2 U1.25 | length 1344.1
  TOP w20: U1.25@-1330.59,5298.88 -1322.47,5307
  TOP w30: -1322.47,5307 -1252.07,5307 -1217.07,5342 -1128.5,5342 C9.1
  TOP w40: C9.1 -1119.65,5337.69 -1063.69,5337.69 v2(-1059,5333) ; v2(-853,5148) -598.59,5148 -529,5078.41 Q1.3
  TOP w100: Q3.2 Q3.2@-529,4833.54 ; Q4.2 -170.44,4733.54 Q4.2@-129.95,4693.05 ; Q4.2@-98,4725 Q4.2@-129.95,4693.05 ; Q4.2@-75.9,4639 Q4.2@-129.95,4693.05
  BOT w40: v2(-1059,5333) -1059,5322.22 -884.78,5148 v2(-853,5148)
LX2: C17.1 L2.1 Q5.3 Q6.3 Q7.2 Q8.2 U1.16 | length 1172
  TOP w10: Q7.2@-1457,4595 Q7.2
  TOP w20: U1.16 -1334.76,4934.5 -1333.94,4933.67 -1333.94,4932.95 -1274.5,4873.51 C17.1@-1274.5,4789.36
  TOP w50: Q7.2 -1276.04,4575.96 -1276.04,4776.23 -1274.71,4777.57 -1274.71,4786.43 C17.1
  TOP w100: L2.1 -1763.59,3653.88 L2.1@-1738.29,3679.18 ; Q8.2@-1478.26,3940.74 Q8.2 Q8.2@-1457,4162
NetC26_2: C26.2 R11.1 | length 257.2
  TOP w10: C26.2@-1904,4788.88 C26.2@-1900.06,4788.88 ; C26.2@-1900.06,4770.88 -1871.76,4799.19 -1870.23,4799.19 -1863.85,4805.57 -1713.92,4805.57 -1701.57,4793.22 -1701.57,4785.57 -1686.89,4770.88 R11.1
NetC27_2: C27.2 R12.1 | length 75
  TOP w10: R12.1 C27.2
NetL1_2: L1.2 R3.1 R4.2 U1.32 | length 2533.8
  TOP w10: v2(-1620,5567) -1642,5545 -1642,5488.32 -1629.43,5475.75 -1622.64,5475.75 -1609.56,5462.67 -1609.56,5394.67 -1562.31,5347.42 -1555.24,5340.35 U1.32 ; v2(201,5582) 203.16,5582 206.27,5578.89 231.43,5578.89 265.8,5544.52 R3.1
  TOP w100: L1.2@286.09,5213.17 L1.2@398,5213.17
  BOT w10: v2(-1620,5567) -1495,5692 91,5692 v2(201,5582)
NetL2_2: L2.2 R10.1 R13.2 U1.10 | length 2687.5
  TOP w10: R13.2 -1747.11,4770.88 -1721.57,4745.35 -1721.57,4744.98 -1674.59,4698 v2(-1673,4698) ; U1.10 -1521.51,4954.89 -1521.51,4982.02 -1515,4988.53 -1515,5024 v2(-1516,5025) ; v2(-987,3451) -987,3279.8 R10.1@-985,3277.8
  BOT w10: v2(-1673,4698) -1673,4798.55 -1676,4801.55 -1676,4905.88 -1610.67,4971.21 -1556.88,5025 v2(-1516,5025) -1321.13,5025 -1240.68,4944.55 -1240.68,3843.68 -987,3590 v2(-987,3451)
PGOOD1: R6.2 U1.27 | length 277.5
  TOP w10: U1.27 -1397.76,5306.21 -1395.53,5308.44 -1395.53,5314.47 -1373,5337 -1282.46,5337 -1198.89,5420.57 R6.2
PGOOD2: R7.2 U1.14 | length 94.1
  TOP w10: R7.2@-1399.76,4859.43 -1399.76,4950.65 U1.14
RT: R14.2 U1.2 | length 185.3
  TOP w10: R14.2 -1760.57,5268.11 -1690.2,5197.74 U1.2
SS1: C28.2 U1.29 | length 190.7
  TOP w10: U1.29 -1460.75,5306.21 -1455.08,5311.88 -1455.08,5313.75 -1364.56,5404.27 -1364.56,5405.88 -1345.94,5424.5 C28.2
SS2: R8.1 R9.2 U1.13 | length 165
  TOP w10: R9.2@-1510.98,4856.43 -1499.89,4856.43 -1496.57,4859.75 -1448.11,4859.75 -1429.25,4878.61 U1.13
VBAT: C1.2 C2.2 C3.2 C4.2 C5.2 C6.2 C7.2 J1.1 Q1.2 Q2.2 Q5.2 Q6.2 R1.2 U1.22 VBAT.1 | length 705.8
  TOP w20: VBAT.1@-2392,3243 -2304.9,3330.1 -2304.9,3590.66 J1.1 ; v2(-1882,4976) -1880,4976 -1879,4975 R1.2 ; U1.22 -1224.02,5166.24 v2(-1223.08,5165.3) ; v2@-1223.02,5166.24 C1.2@-1167.38,5166.24
  other v1: -2398.39,3675.44 -2100,3675 -1950,3675 -2325,3750 -2010,3750 -1822,3807 -2400,3825 -2250,3825 -2100,3825 -1950,3825 -1822,3929 -2280,3960 -2430,3975 -1840,4051 -2400,4125 -2280,4125 -1840,4173 -2280,4275 -2430,4290 -1840,4295 -1822,4417 -2400,4425 -2280,4425 -1822,4539 -2430,4590 -2280,4590 -1822,4661 -2280,4710 -525,5175 -375,5175 -225,5175 -75,5175 -831.76,5204.37 -675,5205 45,5250 -902.13,5258.54 -975,5325 -900,5400 45,5400 -975,5475 -900,5550 45,5550 -975,5625 -825,5625 -675,5625 -525,5625 -375,5625 -225,5625 -75,5625 -405,5745 -1170,5760 -1120.71,5835 -1024.29,5835 -927.86,5835 -831.43,5835 -735,5835 -638.57,5835 -542.14,5835 -445.71,5835
VCCINT: C10.2 D1.1 D2.1 R6.1 R7.1 U1.19 | length 1557.5
  TOP w10: v2(-1419.2,4732) -1401.57,4749.63 -1401.57,4755.88 -1386.89,4770.57 R7.1@-1380.63,4770.57 ; v2(-1295,5268) -1296,5268 -1331,5233 -1331,5072 ; v2(-1284.68,4926.32) -1284.68,4960.54 -1331,5006.86 -1331,5072 ; U1.19 -1278.78,5071.88 -1330.88,5071.88 -1331,5072 ; v2(-1200,5376) -1190.12,5385.88 -1159.21,5385.88 -1145,5400.09 -1145,5451.32 -1185.11,5491.43 R6.1
  TOP w20: U1.19 -1220.12,5071.76 -1172.92,5024.56 -1136.55,5024.56 -1122.93,5010.94 C10.2 -1125.98,5003.95 -1125.98,4927.05 D1.1 -1116.39,4911.36 -1116.39,4886.11 -1033.86,4803.59 -991.61,4803.59 -978.98,4790.95 D2.1
  BOT w10: v2(-1419.2,4732) -1419.2,4791.8 v2(-1284.68,4926.32) ; v2(-1295,5268) -1295,5268.06 -1278.06,5285 -1278.06,5295.95 -1200,5374.01 v2(-1200,5376)
pads on no net: MH1.0 MH2.0 MH3.0 MH4.0

## Polygon pours and split planes (outlines as drawn)
GND on TOP "TOP_GND" (solid, remove dead copper, pour order 75): -3015,2847 -3015,6480 cw(c-2915,6480) -2915,6580 1650,6580 cw(c1650,6480) 1750,6480 1750,2847 cw(c1650,2847) 1650,2747 -2915,2747 cw(c-2915,2847)
VBAT on TOP "NONET_L04_P-001" (solid, remove dead copper, pour order 71): -873.93,5124.93 -1018,5269 -1018,5603.93 -1086.07,5672 -1165.21,5672 -1194,5700.79 -1194,5809.11 -1145.11,5858 -383,5858 -383,5773 -321.44,5711.44 -16.44,5711.44 77,5618 77,5123
VBAT on TOP "NONET_L04_P-001" (solid, remove dead copper, pour order 66): -2426.75,4732 -1749,4732 -1749,3740.52 -1749.52,3740 -1905,3740 -1905,3611.32 -2391.49,3611.32 -2454.11,3673.93 -2454.11,4704.65
LX2 on TOP "NONET_L04_P-001" (solid, remove dead copper, pour order 62): -1643,3230 -1684,3189 -1856.57,3189 -1876.43,3189 -1898.02,3210.59 -1898.02,3740 -1749,3740 -1749,4732 -1183,4732 -1131.2,4680.2 -1131.2,3867.01 -1197.6,3800.6 -1424.4,3800.6 -1643,3582
NetL2_2 on TOP "NONET_L04_P-001" (solid, pour order 72): -1204.77,3773 -864.44,3773 -862.89,3771.45 -862.89,3107.89 -862,3107 -1126,3107 -1248,3229 -1248,3729.77
24V on TOP "NONET_L04_P-001" (solid, remove dead copper, pour order 69): -862.89,3108.79 -862.89,3909.4 -802.39,3969.91 671.24,3969.91 741.39,4040.05 740,4041.44 740,5272.35 675.35,5337 405,5337 357,5385 357,5579 316,5620 75,5620 -16.44,5711.44 -321.44,5711.44 -382,5772 -382,5946 -340,5988 1092,5988 1145.39,5934.61 1145.39,5755.39 1101.44,5711.44 1034.79,5711.44 999,5675.65 999,5528 1064,5463 1174,5463 1224,5413 1224,5320 1170.75,5266.75 1170.75,3503.75 952,3285 -440,3285 -618,3107 -861,3107
LX1 on TOP "NONET_L04_P-001" (solid, remove dead copper, pour order 70): 741,4439 740,4440 740,5063 137,5063 77,5123 -872,5123 -873.93,5124.93 -900.43,5098.42 -900.43,4579.17 -815.26,4494 -42.38,4494 13.61,4438.01 15.59,4438.01
NetL1_2 on TOP "NONET_L04_P-001" (solid, remove dead copper, pour order 60): 77,5618 312,5618 357,5573 357,5385 405,5337 675.35,5337 740,5272.35 740,5063 137,5063 77,5123
24V on TOP "NONET_L04_P-001" (solid, remove dead copper, pour order 61): -861,3418.59 -781.72,3418.59 -752.4,3447.91 -744.5,3447.91 -699.58,3403 -702.04,3400.54 -702.04,3181.66 -723.99,3159.71 -726.28,3162 -861,3162
GND on BOT "BOT_GND" (solid, pour order 76): -3015,2847 -3015,6480 cw(c-2915,6480) -2915,6580 1650,6580 cw(c1650,6480) 1750,6480 1750,2847 cw(c1650,2847) 1650,2747 -2915,2747 cw(c-2915,2847)
24V on PWR (split plane): 1657.84,6559.61 1665.61,6558.46 1673.22,6556.55 1680.61,6553.91 1687.71,6550.55 1694.44,6546.51 1700.75,6541.84 1706.57,6536.57 1711.84,6530.75 1716.51,6524.44 1720.55,6517.71 1723.91,6510.61 1726.55,6503.22 1728.46,6495.61 1729.61,6487.84 1729.97,6480.63 1729.9,6480 1729.9,2847 1729.97,2846.37 1729.61,2839.16 1728.46,2831.39 1726.55,2823.78 1723.91,2816.39 1720.55,2809.29 1716.51,2802.56 1711.84,2796.25 1706.57,2790.43 1700.75,2785.16 1694.44,2780.49 1687.71,2776.45 1680.61,2773.09 1673.22,2770.45 1665.61,2768.54 1657.84,2767.39 1650.63,2767.03 1650,2767.1 -849.34,2767.1 -849.34,4835.06 -653.95,5030.45 -13,5030.45 -12.02,5030.65 -11.2,5031.2 78.8,5121.2 79.35,5122.02 79.55,5123 79.55,5618 79.35,5618.98 78.8,5619.8 -14.51,5713.12 -15.34,5713.67 -16.32,5713.87 -320.26,5713.87 -379.45,5773.06 -379.45,6559.9 1650,6559.9 1650.63,6559.97
VBAT on PWR (split plane): -2915,6559.9 -384.55,6559.9 -384.55,5772 -384.35,5771.02 -383.8,5770.2 -323.24,5709.64 -323.12,5709.51 -322.29,5708.96 -321.32,5708.77 -17.37,5708.77 74.45,5616.94 74.45,5124.06 -14.06,5035.55 -655,5035.55 -655.98,5035.35 -656.8,5034.8 -853.69,4837.92 -854.24,4837.09 -854.44,4836.11 -854.44,2767.1 -2915,2767.1 -2915.63,2767.03 -2922.84,2767.39 -2930.61,2768.54 -2938.22,2770.45 -2945.61,2773.09 -2952.71,2776.45 -2959.44,2780.49 -2965.75,2785.16 -2971.57,2790.43 -2976.84,2796.25 -2981.51,2802.56 -2985.55,2809.29 -2988.91,2816.39 -2991.55,2823.78 -2993.46,2831.39 -2994.61,2839.16 -2994.97,2846.37 -2994.9,2847 -2994.9,6480 -2994.97,6480.63 -2994.61,6487.84 -2993.46,6495.61 -2991.55,6503.22 -2988.91,6510.61 -2985.55,6517.71 -2981.51,6524.44 -2976.84,6530.75 -2971.57,6536.57 -2965.75,6541.84 -2959.44,6546.51 -2952.71,6550.55 -2945.61,6553.91 -2938.22,6556.55 -2930.61,6558.46 -2922.84,6559.61 -2915.63,6559.97
GND on GND (split plane): 1657.84,6559.61 1665.61,6558.46 1673.22,6556.55 1680.61,6553.91 1687.71,6550.55 1694.44,6546.51 1700.75,6541.84 1706.57,6536.57 1711.84,6530.75 1716.51,6524.44 1720.55,6517.71 1723.91,6510.61 1726.55,6503.22 1728.46,6495.61 1729.61,6487.84 1729.97,6480.63 1729.9,6480 1729.9,2847 1729.97,2846.37 1729.61,2839.16 1728.46,2831.39 1726.55,2823.78 1723.91,2816.39 1720.55,2809.29 1716.51,2802.56 1711.84,2796.25 1706.57,2790.43 1700.75,2785.16 1694.44,2780.49 1687.71,2776.45 1680.61,2773.09 1673.22,2770.45 1665.61,2768.54 1657.84,2767.39 1650.63,2767.03 1650,2767.1 -2915,2767.1 -2915.63,2767.03 -2922.84,2767.39 -2930.61,2768.54 -2938.22,2770.45 -2945.61,2773.09 -2952.71,2776.45 -2959.44,2780.49 -2965.75,2785.16 -2971.57,2790.43 -2976.84,2796.25 -2981.51,2802.56 -2985.55,2809.29 -2988.91,2816.39 -2991.55,2823.78 -2993.46,2831.39 -2994.61,2839.16 -2994.97,2846.37 -2994.9,2847 -2994.9,6480 -2994.97,6480.63 -2994.61,6487.84 -2993.46,6495.61 -2991.55,6503.22 -2988.91,6510.61 -2985.55,6517.71 -2981.51,6524.44 -2976.84,6530.75 -2971.57,6536.57 -2965.75,6541.84 -2959.44,6546.51 -2952.71,6550.55 -2945.61,6553.91 -2938.22,6556.55 -2930.61,6558.46 -2922.84,6559.61 -2915.63,6559.97 -2915,6559.9 1650,6559.9 1650.63,6559.97

## Other copper
TOP:
  pour cut-out: -2083,5059.95 -2083,4732 -2079.97,4735.03 -1237.65,4735.03 -1237.65,5293.03 -1122,5408.67 -1122,5551 -1202,5631 -1948,5631 -2083,5496 -2083,5240 -2060,5240 -2060,5480 -1940,5600 -1220,5600 -1154.6,5534.6 -1154.6,5419.41 -1267.01,5307 -1266.34,5306.33 -1266.34,4760 -2060,4760 -2060,5059.95
PWR (plane layer: these items are gaps in the copper):
  lines w5: -863.09,2747 -862.89,2747.2 ; -851.89,2747 -851.89,4836.11 -655,5033 -13,5033 77,5123 77,5618 -16.32,5711.32 -321.32,5711.32 -321.44,5711.44 -382,5772 -382,6577.41 -384.59,6580

## Silkscreen, mask and mechanical layers (free items; w line width, h text height)
Top Overlay:
  text "GND" at 1404.35,5510 h60 r90
  text "24V" at 1405,5329.95 h60 r90
  text "VBAT" at -2485,3774.95 h60 r270
  text "GND" at -2484.35,3565 h60 r270
Mechanical 15:
  drawing of 156 lines, arcs and shapes, not listed